# Altium PCB Copy of Controller.PcbDoc (part 2 of 2)
Units mm, origin at the board's own origin, x right, y up, seen from the top; angles counter-clockwise.
Board outline 100 x 80 mm, 2 copper layers (Top Layer, Bottom Layer); 164 components, 143 nets, 702 pads, 520 vias.
Unrouted connection lines stored in the file: 175.
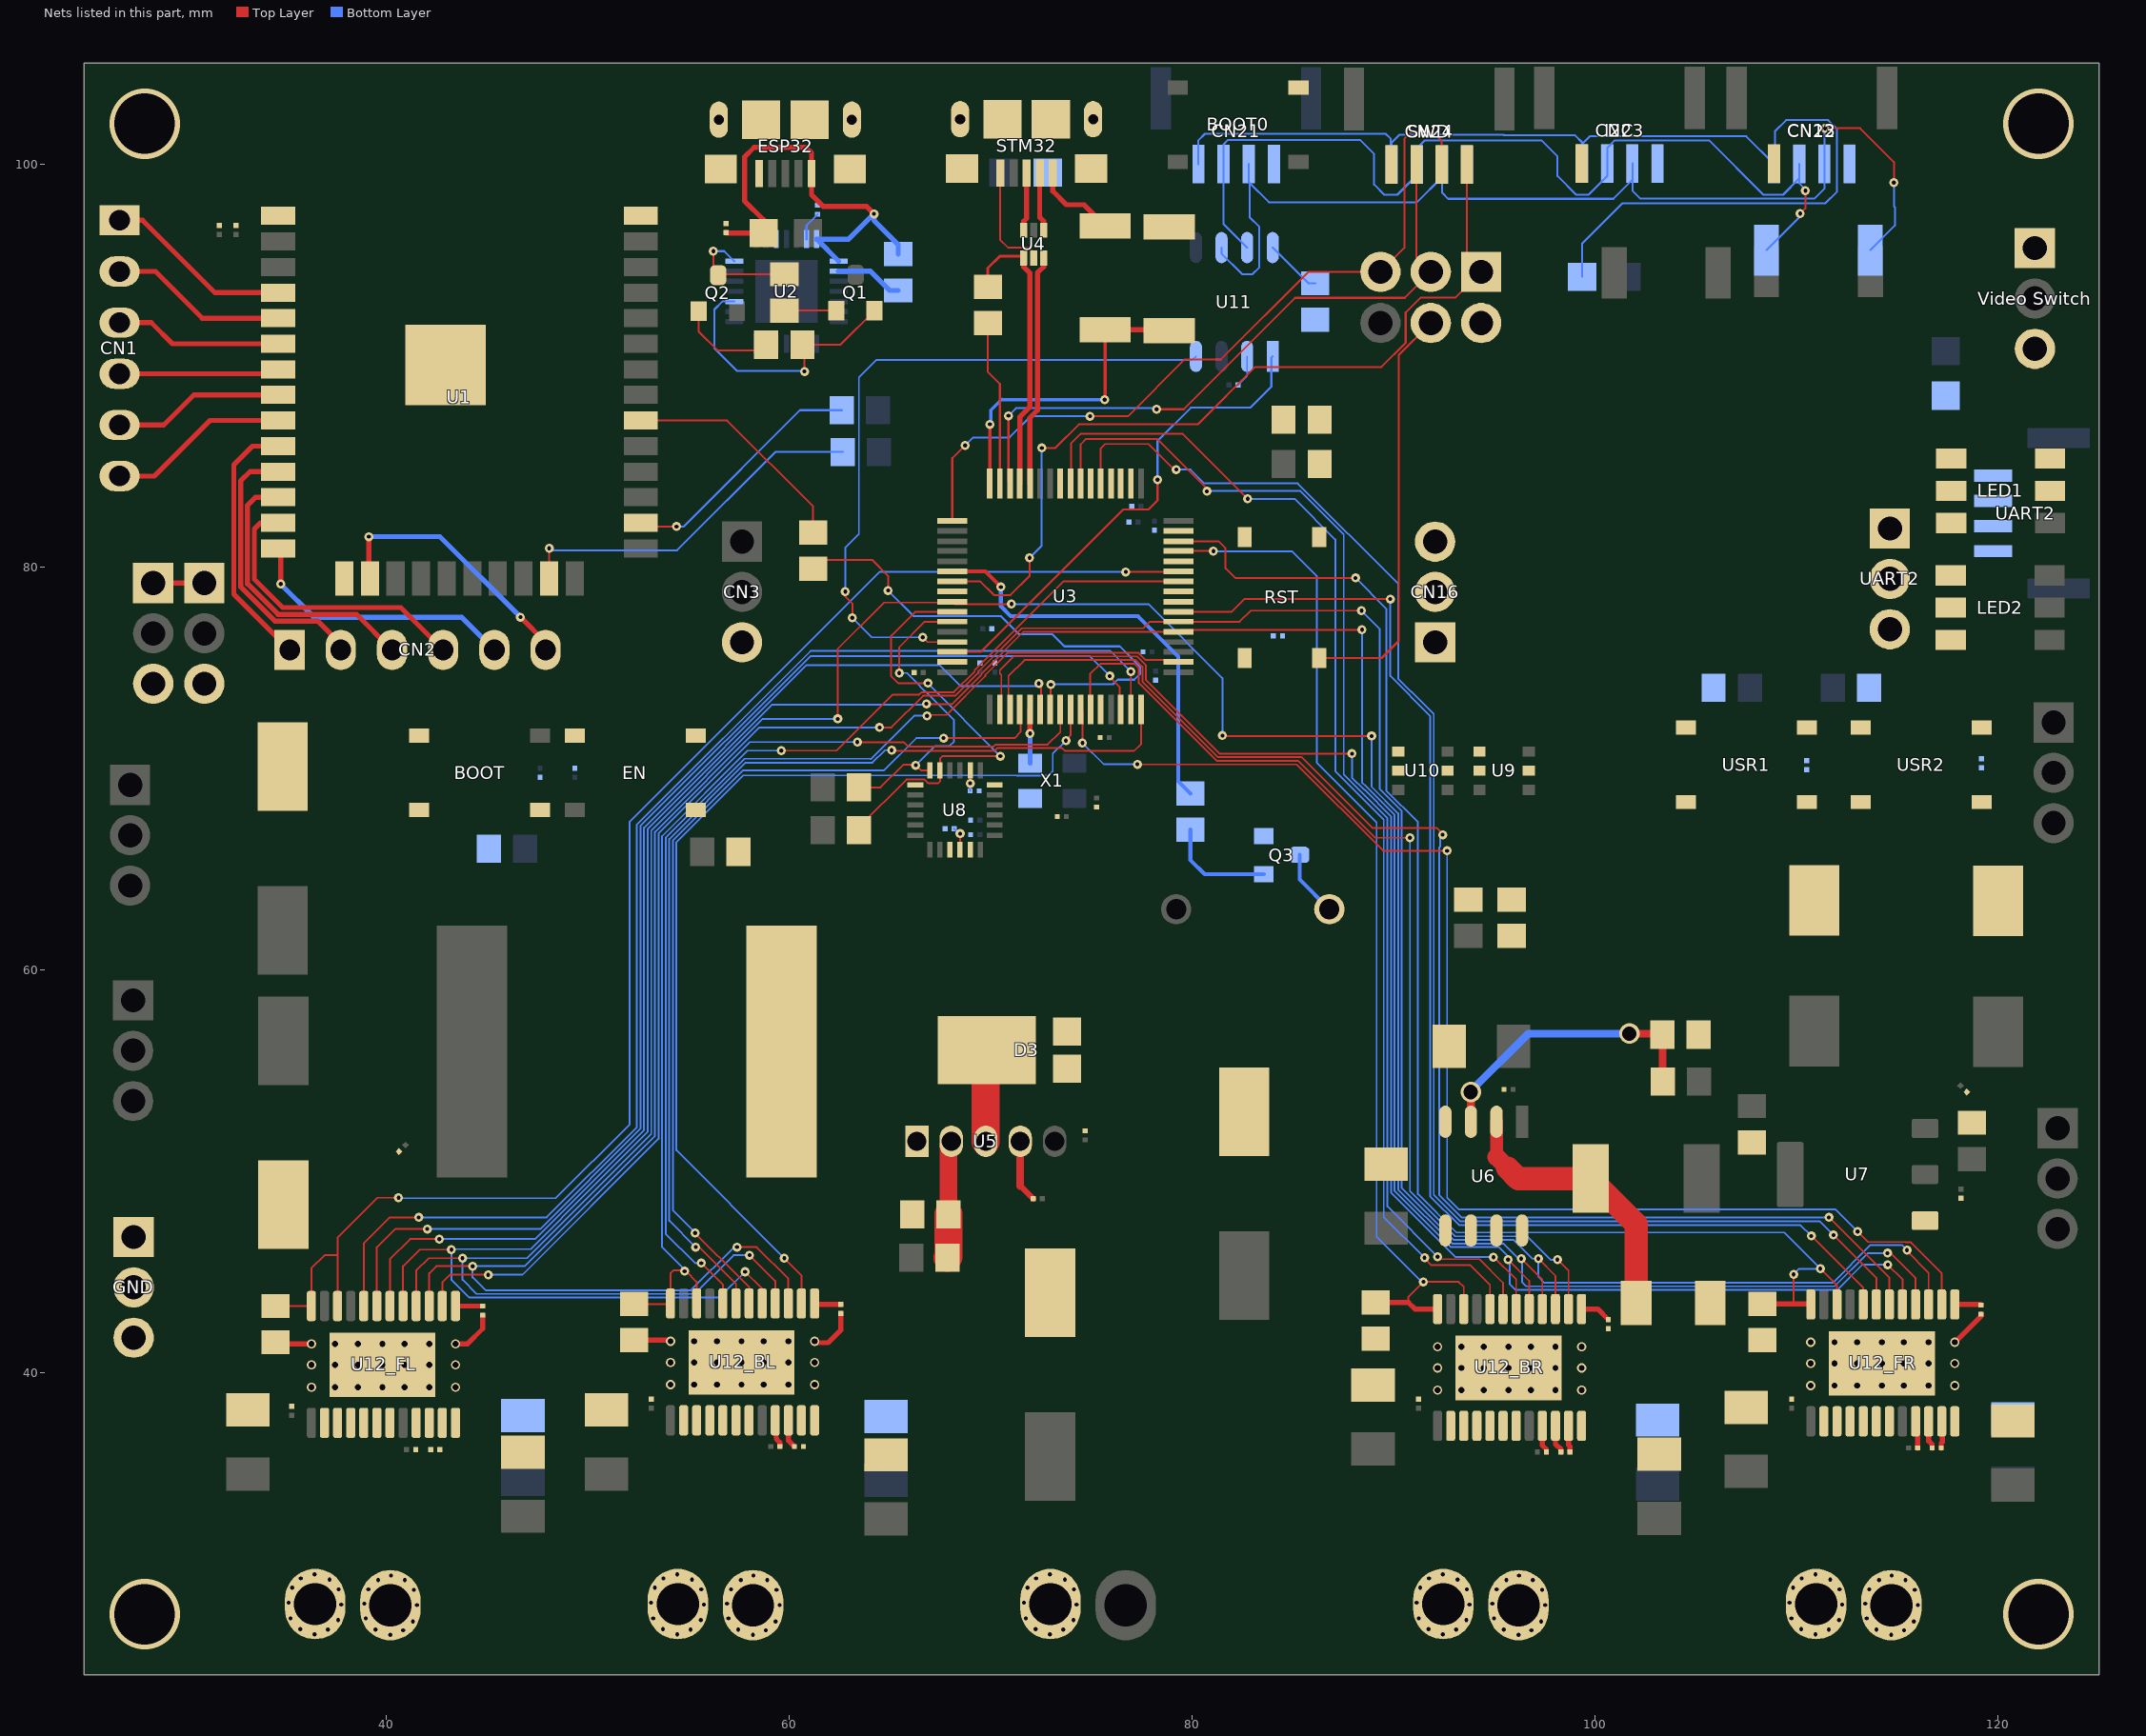
[diagram p2: the nets of this part, all layers, seen from the top]

## Via types
v1: diameter 0.457, hole 0.305, Top Layer to Bottom Layer, tented both sides, 160 vias
v2: diameter 0.45, hole 0.2, Top Layer to Bottom Layer, tented both sides, 142 vias
v3: diameter 0.276, hole 0.2, Top Layer to Bottom Layer, tented both sides, 120 vias
v4: diameter 0.457, hole 0.3, Top Layer to Bottom Layer, tented both sides, 84 vias
v5: diameter 0.45, hole 0.203, Top Layer to Bottom Layer, tented both sides, 4 vias
v6: diameter 3.5, hole 3, Top Layer to Bottom Layer, 4 vias
v7: diameter 1.6, hole 0.8, Top Layer to Bottom Layer, tented both sides, 3 vias
v8: diameter 1.016, hole 0.711, Top Layer to Bottom Layer, tented both sides, 2 vias
v9: diameter 1.981, hole 1.27, Top Layer to Bottom Layer, tented both sides, 1 vias

## Nets (pads, with @x,y where several pads share a name; then routed paths per layer and width w, separated by ;. In a path a pad name is that pad's centre, name@x,y a point inside that pad or via, vN(x,y) a via of type N, cw(c..) or ccw(c..) an arc to the next point about the centre after c; other vN are vias at no path point) (continued)
GND: "3S INPUT.K" "Video Switch.3" BOOT.3 C1.1 C2.1 C3.1 C4.1 C7.1 C8.1 C9.1 C10.1 C11.1 C12.1 C13.1 C14.1 C15.1 C16.1 C17.1 C18.2 C23.1 C24.2 C25.1 C26.1 C27.1 C28.1 C29.2 C30.2 C31.2 C32.2 C33.1 C34.1 C35.1 C36.1 C37.2 C38.1 C39.1 C40.1 C41.1 C42.1 C43.2 C46.1 C47.1 C48.1 C49.1 CN3.3 CN13.4 CN16.3 CN21.4 CN22.4 CN23.4 CN24.4 D3.1 D3.2 D4.A EN.3 ESP32.5 ESP32.S GND.1 GND.2 GND.3 I2C.4 LED1.3 LED2.3 pad.1@94.34,92.105 pad.3@28.421,74.197 pad.3@30.961,74.197 Q3.2 R9.1 R13.1 R16.2 R19.1 R23.2 R28.1 R29.1 RST.3 STM32.5 STM32.S SWD.4 U1.1 U1.15 U1.38 U2.3 U3.12 U3.31 U3.63 U4.2 U5.1 U6.4 U6.5 U6.6 U6.7 U6.8 U7.1 U8.1 U8.9 U8.11 U8.18 U9.2 U10.2 U11.2 U12_BL.16 U12_BL.17 U12_BL.24 U12_BL.THERM U12_BR.16 U12_BR.17 U12_BR.24 U12_BR.THERM U12_FL.16 U12_FL.17 U12_FL.24 U12_FL.THERM U12_FR.16 U12_FR.17 U12_FR.24 U12_FR.THERM UART2.3@114.625,76.9 UART2.4 USR1.3 USR2.3 X1.2 | length 17.5
  Top Layer w0.089: STM32.5@70.475,99.55 70.454,99.529 70.454,96.246 70.85,95.85 71.9,95.85 72.125,95.625 U4.2@72.125,95.335
  Top Layer w0.254: R29.1@34.5,41.5 34.575,41.425 v4(36.275,41.425) ; v4(43.425,41.425) 44.025,41.425 44.775,42.175 C43.2@44.775,42.85 ; R29.1@52.3,41.6 54.05,41.6 v4(54.1,41.55) ; v4(61.25,41.55) 61.325,41.475 61.925,41.475 62.55,42.1 C43.2@62.55,42.925 ; v4(117.85,41.5) 119.15,42.8 C43.2@119.15,42.9
  Bottom Layer w0.089: C42.1@82.275,89.025 82.72,89.47 U11.2@82.72,90.45
  other v3: 72.935,27.001 73.595,27.23 72.223,27.255 74.103,27.713 71.741,27.789 74.255,28.475 71.639,28.576 74.128,29.237 71.817,29.313 73.671,29.719 72.249,29.77 72.935,29.973
  other v4: 92.175,39.125 93.35,39.125 94.475,39.125 95.7,39.125 96.8,39.125 98.025,39.125 99.325,39.125 36.275,39.275 37.45,39.275 38.575,39.275 39.8,39.275 40.9,39.275 42.125,39.275 43.425,39.275 110.7,39.35 111.875,39.35 113,39.35 114.225,39.35 115.325,39.35 116.55,39.35 117.85,39.35 54.1,39.4 55.275,39.4 56.4,39.4 57.625,39.4 58.725,39.4 59.95,39.4 61.25,39.4 92.175,40.225 93.35,40.225 94.475,40.225 95.7,40.225 96.8,40.225 98.025,40.225 99.325,40.225 36.275,40.375 37.45,40.375 38.575,40.375 39.8,40.375 40.9,40.375 42.125,40.375 43.425,40.375 110.7,40.45 111.875,40.45 113,40.45 114.225,40.45 115.325,40.45 116.55,40.45 117.85,40.45 54.1,40.5 55.275,40.5 56.4,40.5 57.625,40.5 58.725,40.5 59.95,40.5 61.25,40.5 92.175,41.275 93.35,41.275 94.475,41.275 95.7,41.275 96.8,41.275 98.025,41.275 99.325,41.275 37.45,41.425 38.575,41.425 39.8,41.425 40.9,41.425 42.125,41.425 110.7,41.5 111.875,41.5 113,41.5 114.225,41.5 115.325,41.5 116.55,41.5 55.275,41.55 56.4,41.55 57.625,41.55 58.725,41.55 59.95,41.55
  other v6: 28,28 122,28 28,102 122,102
IN_I2C_SCL: R25.1 U3.58 U8.23 | length 22.1
  Top Layer w0.089: R25.1@63.45,66.925 63.45,67.084 65.805,69.438 66.705,69.438 66.894,69.25 67.375,69.25 67.475,69.35 U8.23@67.475,69.895 67.475,70.475 67.6,70.6 v2(70.475,70.6) ; v2@66.875,74.25 v2(66.875,74.225) 65.389,74.225 65.054,74.561 65.054,74.796 65.05,74.8 65.05,76.575 66.238,77.763 U3.58@68.087,77.763
  Bottom Layer w0.089: v2(66.875,74.225) 66.85,74.225 v2(70.475,70.6)
IN_I2C_SDA: R24.1 U3.59 U8.24 | length 15.7
  Top Layer w0.089: R24.1@63.45,69.05 64.525,69.05 65.65,70.175 66.25,70.175 v2(66.275,70.15) 66.53,69.895 U8.24@66.975,69.895 ; v2(65.45,74.725) 65.45,76 66.725,77.275 68.081,77.275 U3.59@68.087,77.28
  Bottom Layer w0.089: v2(65.45,74.725) 65.839,74.725 66.479,74.085 66.479,74.061 66.711,73.829 66.742,73.829 68.175,72.396 68.175,71.325 67.954,71.104 67.229,71.104 v2(66.275,70.15)
NetC3_2: C3.2 U2.6 | length 1.5
  Bottom Layer w0.1: U2.6@60.85,96.265 60.85,96.95 C3.2@61.4,97.5
NetC5_1: C5.1 EN.4
NetC6_1: BOOT.4 C6.1
NetC19_1: C19.1 RST.4
NetC20_1: C20.1 USR2.4
NetC21_1: C21.1 USR1.4
NetC22_1: C22.1 U5.4 | length 3.1
  Top Layer w0.305: 71.46,49.265 C22.1@72.1,48.625
  Top Layer w0.381: 71.46,49.265 U5.4@71.46,51.475
NetC40_2: C40.2 U8.20 | length 1
  Top Layer w0.089: v2(68.975,69.25) U8.20@68.975,69.895
  Bottom Layer w0.089: C40.2@68.975,68.875 v2(68.975,69.25)
NetC41_2: C41.2 U8.10 | length 1.2
  Top Layer w0.1: U8.10@68.475,65.955 v2(68.475,66.75)
  Bottom Layer w0.1: C41.2@68.175,67 68.425,66.75 v2(68.475,66.75)
NetC43_BL_1: C43.1@62.55,43.375 U12_BL.1 | length 1.3
  Top Layer w0.254: U12_BL.1@61.25,43.425 61.3,43.375 C43.1@62.55,43.375
NetC43_BR_1: C43.1@100.65,42.625 U12_BR.1 | length 1.5
  Top Layer w0.254: U12_BR.1@99.325,43.15 100.125,43.15 C43.1@100.65,42.625
NetC43_FL_1: C43.1@44.775,43.3 U12_FL.1 | length 1.3
  Top Layer w0.254: U12_FL.1@43.425,43.3 C43.1@44.775,43.3
NetC43_FR_1: C43.1@119.15,43.35 U12_FR.1 | length 1.3
  Top Layer w0.254: U12_FR.1@117.85,43.375 119.125,43.375 C43.1@119.15,43.35
NetC44_BL_1: C44.1@59.525,36.325 U12_BL.21 | length 2
  Top Layer w0.254: U12_BL.21@59.3,37 U12_BL.21@59.3,37.625 59.35,37.575 59.35,36.7 59.525,36.525 C44.1@59.525,36.325
NetC44_BR_1: C44.1@97.575,36.05 U12_BR.21 | length 1.4
  Top Layer w0.254: U12_BR.21@97.375,37.35 97.375,36.375 97.575,36.175 C44.1@97.575,36.05
NetC44_FL_1: C44.1@41.45,36.175 U12_FL.21
NetC44_FR_1: C44.1@116,36.25 U12_FR.21 | length 1.4
  Top Layer w0.254: U12_FR.21@115.9,37.575 116,37.475 C44.1@116,36.25
NetC45_BL_1: C45.1@60.7,36.325 U12_BL.23 | length 0.1
  Top Layer w0.254: U12_BL.23@60.6,37.625 U12_BL.23@60.7,37.525
NetC45_BL_2: C45.2@60.25,36.325 U12_BL.22 | length 1.4
  Top Layer w0.254: U12_BL.22@59.95,37.625 59.95,36.625 C45.2@60.25,36.325
NetC45_BR_1: C45.1@98.75,36.05 U12_BR.23 | length 1.3
  Top Layer w0.254: U12_BR.23@98.675,37.35 98.675,36.4 98.75,36.325 C45.1@98.75,36.05
NetC45_BR_2: C45.2@98.3,36.05 U12_BR.22 | length 1.4
  Top Layer w0.254: U12_BR.22@98.025,37.35 98.025,36.45 98.3,36.175 C45.2@98.3,36.05
NetC45_FL_1: C45.1@42.65,36.175 U12_FL.23
NetC45_FL_2: C45.2@42.2,36.175 U12_FL.22
NetC45_FR_1: C45.1@117.175,36.25 U12_FR.23 | length 1.4
  Top Layer w0.254: C45.1@117.175,36.25 117.175,36.5 117.225,36.55 117.225,37.55 U12_FR.23@117.2,37.575
NetC45_FR_2: C45.2@116.725,36.25 U12_FR.22 | length 1.4
  Top Layer w0.254: U12_FR.22@116.55,37.575 116.55,36.6 116.725,36.425 C45.2@116.725,36.25
NetCN1_1: CN1.1 U1.4 | length 9.4
  Top Layer w0.25: CN1.1@26.75,97.205 27.895,97.205 31.485,93.615 U1.4@34.625,93.615
NetCN1_2: CN1.2 U1.5 | length 8.8
  Top Layer w0.25: CN1.2@26.75,94.665 28.535,94.665 30.855,92.345 U1.5@34.625,92.345
NetCN1_3: CN1.3 U1.6 | length 8.3
  Top Layer w0.25: CN1.3@26.75,92.125 28.325,92.125 29.375,91.075 U1.6@34.625,91.075
NetCN1_4: CN1.4 U1.7 | length 8
  Top Layer w0.25: CN1.4@26.75,89.585 34.405,89.585 U1.7@34.625,89.805
NetCN1_5: CN1.5 U1.8 | length 8.5
  Top Layer w0.25: CN1.5@26.75,87.045 28.945,87.045 30.435,88.535 U1.8@34.625,88.535
NetCN1_6: CN1.6 U1.9 | length 9
  Top Layer w0.25: CN1.6@26.75,84.505 28.48,84.505 31.24,87.265 U1.9@34.625,87.265
NetCN2_1: CN2.1 U1.10 | length 12.9
  Top Layer w0.25: U1.10@34.625,85.995 33.345,85.995 32.425,85.075 32.425,78.645 CN2.1@35.195,75.875
NetCN2_2: CN2.2 U1.11 | length 13.7
  Top Layer w0.25: U1.11@34.625,84.725 33.225,84.725 32.764,84.264 32.764,79.011 34.475,77.3 36.6,77.3 37.735,76.165 CN2.2@37.735,75.875
NetCN2_3: CN2.3 U1.12 | length 14.1
  Top Layer w0.25: U1.12@34.625,83.455 33.505,83.455 33.103,83.053 33.103,79.151 34.615,77.639 38.511,77.639 CN2.3@40.275,75.875
NetCN2_4: CN2.4 U1.13 | length 14.6
  Top Layer w0.25: U1.13@34.625,82.185 33.752,82.185 33.442,81.875 33.442,79.383 34.847,77.978 40.712,77.978 CN2.4@42.815,75.875
NetCN2_5: CN2.5 U1.14 | length 13.8
  Top Layer w0.25: U1.14@34.625,80.915 34.75,80.79 v2(34.75,79.15)
  Bottom Layer w0.25: v2(34.75,79.15) 36.4,77.5 43.73,77.5 CN2.5@45.355,75.875
NetCN2_6: CN2.6 U1.16 | length 13.4
  Top Layer w0.25: v2(39.125,81.5) 39.125,79.47 U1.16@39.18,79.415 ; v2(46.65,77.5) 47.895,76.255 CN2.6@47.895,75.875
  Bottom Layer w0.25: v2(39.125,81.5) 42.65,81.5 v2(46.65,77.5)
NetCN14_1: CN16.1 pad.1@28.421,79.197 pad.1@30.961,79.197 U3.24 | length 2.5
  Top Layer w0.25: pad.1@28.421,79.197 pad.1@30.961,79.197
NetCN16_2: CN16.2 U3.25
NetCN18_1: "Video Switch.1" U3.34
NetCN19_1: D5.K UART2.1@119.75,84.525
NetCN19_2: U3.56 UART2.1@114.625,81.9 UART2.2@119.75,83.275
NetCN21_1: CN21.1 CN22.1 CN23.1 CN24.1 D6.K | length 58
  Bottom Layer w0.1: CN21.1@80.3,100 80.3,101.175 80.625,101.5 89.6,101.5 89.85,101.25 89.85,100.02 CN24.1@89.896,99.974 89.896,101.071 90.275,101.45 95.45,101.45 95.475,101.425 99,101.425 99.35,101.075 99.35,101 ; D6.K@99.35,94.4 99.35,96.05 101.35,98.05 111.425,98.05 112,98.625 112,101.744 111.567,102.177 109.477,102.177 108.925,101.625 108.925,100.05 CN22.1@108.875,100 107.5,101.375 99.725,101.375 99.35,101 ; CN23.1@99.35,100.025 99.35,101
NetCN21_2: CN21.2 CN22.2 CN23.2 CN24.2 R27.2 U11.7 | length 48.5
  Top Layer w0.1: v2(110.175,97.539) 110.43,97.795 v2(110.43,98.68) v2@110.43,98.73
  Bottom Layer w0.1: U11.7@82.72,95.85 81.55,97.02 CN21.2@81.55,100 81.55,100.975 81.775,101.2 88.325,101.2 89.025,100.5 89.025,98.975 89.525,98.475 90.175,98.475 91.146,99.446 CN24.2@91.146,99.974 91.146,100.771 91.55,101.175 97.325,101.175 98.125,100.375 98.125,99.4 99.05,98.475 99.675,98.475 100.6,99.4 CN23.2@100.6,100.025 100.6,100.8 100.975,101.175 105.65,101.175 108.35,98.475 109.325,98.475 CN22.2@110.125,99.275 ; R27.2@108.496,95.725 110.175,97.404 v2(110.175,97.539) ; CN22.2@110.125,100 CN22.2@110.125,99.275 ; v2(110.43,98.68) 110.43,98.745 110.125,99.05 CN22.2@110.125,99.275
NetCN21_3: CN21.3 CN22.3 CN23.3 CN24.3 R27.1 U11.6 | length 53.2
  Top Layer w0.1: v2(111.4,101.775) 113.15,101.775 114.825,100.1 v2(114.825,99.075)
  Bottom Layer w0.1: U11.6@81.45,95.85 81.45,95.55 82.475,94.525 82.975,94.525 83.325,94.875 83.325,96.875 82.85,97.35 CN21.3@82.85,99.05 ; CN21.3@82.8,100 82.8,99.1 CN21.3@82.85,99.05 ; CN24.3@92.396,99.974 CN24.3@92.396,99.346 ; CN23.3@101.85,100.025 CN23.3@101.85,99.225 ; v2(111.4,101.775) 111.4,101.8 111.375,101.775 CN22.3@111.375,100 111.375,98.775 110.878,98.278 102.247,98.278 101.85,98.675 CN23.3@101.85,99.225 ; R27.1@113.653,95.725 114.875,96.947 114.875,97.85 114.825,97.9 v2(114.825,99.075) ; CN21.3@82.85,99.05 83.8,98.1 91.15,98.1 CN24.3@92.396,99.346 ; CN24.3@92.396,99.346 92.396,98.579 92.7,98.275 100.9,98.275 CN23.3@101.85,99.225
NetCN25_A: FL_MOT.A U12_FL.18 U12_FL.19
  other v3: 40.194,26.976 40.829,27.205 39.457,27.23 41.311,27.636 38.975,27.789 41.515,28.449 38.898,28.525 41.362,29.211 39.102,29.237 39.584,29.694 40.905,29.694 40.219,29.922
NetCN25_K: FL_MOT.K U12_FL.14 U12_FL.15
  other v3: 36.435,27.001 37.095,27.23 35.723,27.255 37.603,27.713 35.241,27.789 37.755,28.475 35.139,28.576 37.628,29.237 35.317,29.313 37.171,29.719 35.749,29.77 36.435,29.973
NetCN26_A: FR_MOT.A U12_FR.18 U12_FR.19
  other v3: 114.694,26.976 115.329,27.205 113.957,27.23 115.811,27.636 113.475,27.789 116.015,28.449 113.398,28.525 115.862,29.211 113.602,29.237 114.084,29.694 115.405,29.694 114.719,29.922
NetCN26_K: FR_MOT.K U12_FR.14 U12_FR.15
  other v3: 110.935,27.001 111.595,27.23 110.223,27.255 112.103,27.713 109.741,27.789 112.255,28.475 109.639,28.576 112.128,29.237 109.817,29.313 111.671,29.719 110.249,29.77 110.935,29.973
NetCN27_A: BL_MOT.A U12_BL.18 U12_BL.19
  other v3: 58.194,26.976 58.829,27.205 57.457,27.23 59.311,27.636 56.975,27.789 59.515,28.449 56.898,28.525 59.362,29.211 57.102,29.237 57.584,29.694 58.905,29.694 58.219,29.922
NetCN27_K: BL_MOT.K U12_BL.14 U12_BL.15
  other v3: 54.435,27.001 55.095,27.23 53.723,27.255 55.603,27.713 53.241,27.789 55.755,28.475 53.139,28.576 55.628,29.237 53.317,29.313 55.171,29.719 53.749,29.77 54.435,29.973
NetCN28_A: BR_MOT.A U12_BR.18 U12_BR.19
  other v3: 96.194,26.976 96.829,27.205 95.457,27.23 97.311,27.636 94.975,27.789 97.515,28.449 94.898,28.525 97.362,29.211 95.102,29.237 95.584,29.694 96.905,29.694 96.219,29.922
NetCN28_K: BR_MOT.K U12_BR.14 U12_BR.15
  other v3: 92.435,27.001 93.095,27.23 91.723,27.255 93.603,27.713 91.241,27.789 93.755,28.475 91.139,28.576 93.628,29.237 91.317,29.313 93.171,29.719 91.749,29.77 92.435,29.973
NetD3_3: D3.3 L1.1 U5.3 | length 4.5
  Top Layer w1.397: U5.3@69.75,51.475 69.75,55.962 D3.3@69.793,56.005
NetD4_K: D4.K L2.1 U6.2 | length 14
  Top Layer w0.635: 95.1,50.7 U6.2@95.1,52.45
  Top Layer w0.889: 95.1,50.7 95.65,50.15
  Top Layer w1.143: 95.65,50.15 96.175,49.625 L2.1@99.775,49.625 102.036,47.365 D4.K@102.036,43.45
NetLED1_1: LED1.1 U9.5
NetLED1_2: LED1.2 U10.5
NetLED1_5: LED1.5 LED2.2
NetLED1_6: LED1.6 LED2.1
NetLS1_K: LS1.K Q3.3 | length 3.3
  Bottom Layer w0.2: Q3.3@85.325,65.7 85.325,64.475 LS1.K@86.8,63
NetQ1_1: Q1.1 R4.2 | length 2.6
  Top Layer w0.1: R4.2@59.75,92.725 Q1.1@62.325,92.725
NetQ1_2: Q1.2 R7.1 U2.24 | length 13.7
  Top Layer w0.1: v2(60.75,89.7) 60.75,90.925 R7.1@60.65,91.025 62.525,91.025 Q1.2@64.225,92.725
  Bottom Layer w0.1: U2.24@57.26,93.175 56.675,93.175 56.275,92.775 56.275,90.85 57.4,89.725 60.725,89.725 v2(60.75,89.7)
NetQ2_1: Q2.1 R7.2 | length 4.9
  Top Layer w0.1: Q2.1@55.5,92.7 55.5,91.675 56.425,90.75 58.575,90.75 R7.2@58.85,91.025
NetQ2_3: Q2.3 R4.1 U2.28 | length 5.8
  Top Layer w0.1: v2(56.225,95.675) 56.225,94.718 Q2.3@56.465,94.478 56.512,94.525 R4.1@59.75,94.525
  Bottom Layer w0.1: v2(56.225,95.675) 56.76,95.675 U2.28@57.26,95.175
NetQ3_1: Q3.1 R26.1 | length 5.4
  Bottom Layer w0.2: R26.1@79.9,66.95 79.9,65.45 80.615,64.735 Q3.1@83.547,64.735
NetR1_2: R1.2 U2.9 | length 3.4
  Bottom Layer w0.25: U2.9@62.44,94.675 64.025,94.675 64.975,93.725 R1.2@65.4,93.725
NetR2_2: EN.1 R2.2
NetR3_1: R3.1 U1.30 | length 11.6
  Top Layer w0.1: U1.30@52.625,87.265 56.91,87.265 61.175,83 R3.1@61.175,81.7
NetR5_1: R5.1 U1.26 | length 12.4
  Top Layer w0.1: U1.26@52.625,82.185 52.81,82 v2(54.4,82)
  Bottom Layer w0.1: v2(54.4,82) 54.75,82 60.525,87.775 R5.1@62.6,87.775
NetR6_2: BOOT.1 R6.2
NetR8_1: R8.1 U1.23 | length 18.1
  Top Layer w0.1: U1.23@48.07,79.415 48.075,79.42 v2(48.075,80.925)
  Bottom Layer w0.1: v2(48.075,80.925) 48.177,80.823 54.423,80.823 59.3,85.7 R8.1@62.65,85.7
NetR9_2: BOOT0.3 R9.2
NetR10_1: R10.1 U3.47 | length 8.2
  Top Layer w0.1: R10.1@69.85,92.1 69.85,89.675 70.449,89.076 U3.47@70.449,84.138
NetR11_2: R11.2 RST.1
NetR14_2: R14.2 USR2.1
NetR15_2: R15.2 USR1.1
NetR16_1: R16.1 R17.1 U6.3 | length 14.6
  Top Layer w0.381: v8(93.825,53.925) 93.825,53.725 93.83,53.72 U6.3@93.83,52.45 ; v8(101.7,56.825) 103.275,56.825 R16.1@103.325,56.775 103.35,56.75 R17.1@103.35,54.45
  Bottom Layer w0.381: v8(93.825,53.925) 93.8,53.95 96.675,56.825 v8(101.7,56.825)
NetR18_1: R18.1 R19.2 U5.2 | length 5.9
  Top Layer w0.076: U5.2@67.9,51.335 U5.2@68.04,51.475
  Top Layer w0.889: R19.2@67.9,47.85 U5.2@67.9,51.335
  Top Layer w1.397: R18.1@67.85,45.7 67.9,45.75 R19.2@67.9,47.85
NetR22_1: R22.1 R23.1 U3.28
NetR26_2: R26.2 U3.54 | length 20.6
  Top Layer w0.2: U3.54@68.087,79.77 69.73,79.77 v2(70.5,79)
  Bottom Layer w0.2: v2(70.5,79) 70.5,78.036 70.986,77.55 77.3,77.55 79.3,75.55 79.3,69.35 R26.2@79.9,68.75
NetR28_2: R28.2 U11.8 | length 2.8
  Bottom Layer w0.1: U11.8@83.99,95.85 85.765,94.075 R28.2@86.1,94.075
NetR29_BL_2: R29.2@52.3,43.4 U3.26 U12_BL.10 U12_BL.12 | length 59.1
  Top Layer w0.089: R29.2@52.3,43.4 54.075,43.4 U12_BL.12@54.05,43.425 ; U12_BL.12@54.1,43.425 54.1,44.925 54.25,45.075 54.75,45.075 v2(54.8,45.025) 54.875,45.025 55.4,44.5 U12_BL.10@55.4,43.425 ; v2(59.6,70.875) 62.35,70.875 65.132,73.657 65.307,73.657 65.311,73.654 66.441,73.654 66.566,73.778 68.164,73.778 69.195,74.809 69.195,74.86 73.622,79.287 U3.26@79.313,79.287
  Bottom Layer w0.089: v2(54.8,45.025) 54.875,45.025 53.681,46.219 53.681,66.631 57.925,70.875 v2(59.6,70.875)
NetR29_BR_2: R29.2@89.1,43.475 U3.29 U12_BR.10 U12_BR.12 | length 52.4
  Top Layer w0.089: U3.29@79.313,80.786 79.328,80.8 81.025,80.8 v2(81.05,80.775) ; 90.725,43.475 90.725,43.75 v2(91.475,44.5) 93.225,44.5 93.475,44.25 U12_BR.10@93.475,43.15
  Top Layer w0.254: R29.2@89.1,43.475 90.725,43.475 91.054,43.146 92.171,43.146 U12_BR.12@92.175,43.15
  Bottom Layer w0.089: v2(81.05,80.775) 84.95,80.775 86.175,79.55 86.175,70.275 89.15,67.3 89.15,46.739 91.389,44.5 v2(91.475,44.5)
NetR29_FL_2: R29.2@34.5,43.3 U3.27 U12_FL.10 U12_FL.12 | length 72.9
  Top Layer w0.089: R29.2@34.5,43.3 U12_FL.12@36.275,43.3 36.275,45.175 36.925,45.825 37.55,45.825 37.575,45.85 ; U12_FL.10@37.575,43.3 37.575,45.85 ; v2(40.6,48.675) 39.55,48.675 37.575,46.7 37.575,45.85 ; v2(76.7,79.75) 79.294,79.75 U3.27@79.313,79.77
  Bottom Layer w0.089: v2(40.6,48.675) 40.625,48.65 48.398,48.65 52.075,52.327 52.075,67.35 64.475,79.75 v2(76.7,79.75)
NetR29_FR_2: R29.2@108.3,43.4 U3.30 U12_FR.10 U12_FR.12 | length 71
  Top Layer w0.089: U3.30@79.313,81.268 81.307,81.268 81.65,80.925 81.65,79.925 82.125,79.45 v2(88.1,79.45) ; 109.85,43.4 v2(109.85,44.875) ; v2(111.175,45.15) 112,44.325 U12_FR.10@112,43.375
  Top Layer w0.254: R29.2@108.3,43.4 109.85,43.4 110.675,43.4 U12_FR.12@110.7,43.375
  Bottom Layer w0.089: v2(88.1,79.45) 89.631,77.919 89.631,73.816 89.629,73.814 89.629,68.898 91.196,67.33 91.196,48.861 93.108,46.95 109.375,46.95 v2(111.175,45.15) 110.125,45.15 v2(109.85,44.875)
NetU3_2: U3.2 U12_BR.6 | length 54.3
  Top Layer w0.089: U3.2@70.449,72.912 70.521,72.984 70.521,74.639 70.449,74.712 70.449,74.874 71.127,75.552 77.262,75.552 77.702,75.112 77.702,74.374 81.352,70.725 v2(87.925,70.725) ; v2(94.95,45.725) 94.975,45.725 96.075,44.625 U12_BR.6@96.075,43.15
  Bottom Layer w0.089: v2(87.925,70.725) 87.925,69.531 88.531,68.925 88.55,68.925 89.862,67.613 89.862,48.938 93.075,45.725 v2(94.95,45.725)
NetU3_3: U3.3 U12_FR.6 | length 71.1
  Top Layer w0.089: U3.3@70.957,72.912 70.875,72.993 70.875,74.575 71.674,75.374 77.188,75.374 77.524,75.038 77.524,74.301 81.278,70.547 85.428,70.547 88.95,67.025 92.15,67.025 92.45,66.725 v2(92.425,66.7) ; v2(111.6,47.7) 114.6,44.7 U12_FR.6@114.6,43.375
  Bottom Layer w0.089: v2(92.425,66.7) 92.3,66.7 92.3,66.111 92.254,66.064 92.254,48.811 93.364,47.7 v2(111.6,47.7)
NetU3_4: U3.4 U12_BL.6 | length 45.2
  Top Layer w0.089: v2(55.325,46.925) 55.325,46.914 57.636,44.604 57.646,44.604 58,44.25 U12_BL.6@58,43.425 ; v2(67.65,71.5) 71.175,71.5 71.475,71.8 71.475,72.876 U3.4@71.439,72.912
  Bottom Layer w0.089: v2(55.325,46.925) 55.35,46.925 54.214,48.06 54.214,66.41 57.69,69.885 64.685,69.885 66.3,71.5 v2(67.65,71.5)
NetU3_6: U3.6 U12_FL.6 | length 57.4
  Top Layer w0.089: U12_FL.6@40.175,43.3 40.175,45.625 41.175,46.625 v2(42.625,46.625) ; v2(72.379,74.204) 72.5,74.082 72.5,72.956 U3.6@72.455,72.912
  Bottom Layer w0.089: v2(42.625,46.625) 47.38,46.625 52.787,52.032 52.787,67.055 60.853,75.121 67.442,75.121 68.485,74.079 72.253,74.079 v2(72.379,74.204)
NetU3_8: U3.8 U12_FL.2 | length 53.3
  Top Layer w0.089: U12_FL.2@42.775,43.3 42.775,44.475 43.15,44.85 v2(45.05,44.85) ; v2(63.375,71.3) 63.379,71.296 65.679,71.296 65.897,71.078 70.141,71.078 70.237,71.174 72.824,71.174 73.45,71.8 73.45,72.908 U3.8@73.446,72.912
  Bottom Layer w0.089: v2(45.05,44.85) 46.75,44.85 53.503,51.603 53.503,66.765 58.038,71.3 v2(63.375,71.3)
NetU3_9: U3.9 U12_BL.2 | length 49.1
  Top Layer w0.089: v2(59.75,45.675) 60.6,44.825 U12_BL.2@60.6,43.425 ; v2(73.725,71.375) 73.725,71.4 73.954,71.629 U3.9@73.954,72.912
  Bottom Layer w0.089: v2(59.75,45.675) 54.392,51.033 54.392,66.336 57.703,69.646 71.29,69.646 71.295,69.642 72.867,69.642 73.075,69.85 73.075,70.725 v2(73.725,71.375)
NetU3_10: U3.10 U12_FR.2 | length 66.9
  Top Layer w0.089: U3.10@74.462,72.912 74.55,72.824 v2(74.55,71.25) ; v2(77.275,70.2) 77.284,70.191 85.182,70.191 89.473,65.9 v2(92.65,65.9) ; v2(113.025,47) 113.55,46.475 115.4,46.475 115.404,46.471 115.639,46.471 117.2,44.911 U12_FR.2@117.2,43.375
  Bottom Layer w0.089: v2(74.55,71.25) 75.6,70.2 v2(77.275,70.2) ; v2(92.65,65.9) 92.65,48.666 93.216,48.1 111.925,48.1 v2(113.025,47)
NetU3_11: U3.11 U12_BR.2 | length 50.8
  Top Layer w0.089: U3.11@74.945,72.912 74.925,72.931 74.925,74.671 75.45,75.196 77.114,75.196 77.346,74.964 77.346,74.227 81.204,70.369 85.256,70.369 89.075,66.55 v2(90.8,66.55) ; v2(98.125,45.6) 98.675,45.05 U12_BR.2@98.675,43.15
  Bottom Layer w0.089: v2(90.8,66.55) 90.803,66.547 90.803,49.003 93.048,46.759 96.627,46.759 97.786,45.6 v2(98.125,45.6)
NetU3_14: U3.14 U12_FL.7 | length 62.6
  Top Layer w0.089: U12_FL.7@39.525,43.3 39.525,46.225 40.425,47.125 v2(42.025,47.125) ; v2(75.9,74.575) 75.9,74.525 76.4,74.025 76.4,72.955 U3.14@76.443,72.912
  Bottom Layer w0.089: v2(42.025,47.125) 47.628,47.125 52.609,52.106 52.609,67.129 61.055,75.575 74.9,75.575 v2(75.9,74.575)
NetU3_15: U3.15 U12_FL.8 | length 64.5
  Top Layer w0.089: U12_FL.8@38.875,43.3 38.875,46.4 40.175,47.7 v2(41.6,47.7) ; U3.15@76.951,72.912 76.951,74.799 v2(76.95,74.8)
  Bottom Layer w0.089: v2(41.6,47.7) 47.952,47.7 52.431,52.179 52.431,67.203 61.055,75.827 75.923,75.827 v2(76.95,74.8)
NetU3_16: U3.16 U12_BL.7 | length 51.8
  Top Layer w0.089: v2(55.353,46.227) 55.523,46.227 57.35,44.4 U12_BL.7@57.35,43.425 ; v2(65.075,70.9) 65.121,70.854 70.168,70.854 70.311,70.996 73.543,70.996 73.686,70.854 77.104,70.854 77.459,71.209 U3.16@77.459,72.912
  Bottom Layer w0.089: v2(55.353,46.227) 55.35,46.225 54.037,47.538 54.037,66.483 57.825,70.272 64.124,70.272 64.752,70.9 v2(65.075,70.9)
NetU3_18: U3.18 U12_BL.8 | length 54.1
  Top Layer w0.089: v2(55.628,45.427) 55.628,45.447 56.7,44.375 U12_BL.8@56.7,43.425 ; v2(66.828,72.604) 66.828,72.647 67.797,72.647 69.729,74.579 69.729,74.639 70.819,75.73 77.335,75.73 77.691,75.374 79.213,75.374 U3.18@79.313,75.274
  Bottom Layer w0.089: v2(55.628,45.427) 55.322,45.427 53.859,46.891 53.859,66.557 57.777,70.475 64.025,70.475 64.05,70.45 66.2,72.6 66.196,72.604 v2(66.828,72.604)
NetU3_23: U3.23 U12_FR.8 | length 65.4
  Top Layer w0.089: U3.23@79.313,77.763 81.938,77.763 82.575,78.4 v2(89.825,78.4) ; v2(110.725,46.775) 113.3,44.2 U12_FR.8@113.3,43.375
  Bottom Layer w0.089: v2(89.825,78.4) 89.825,74.575 91.806,72.594 91.806,48.756 93.236,47.325 110.175,47.325 v2(110.725,46.775)
NetU3_35: U3.35 U9.1
NetU3_36: U3.36 U10.1
NetU3_37: U3.37 U12_FR.7 | length 75.5
  Top Layer w0.089: U3.37@75.453,84.138 75.453,85.878 75.675,86.1 77.825,86.1 79.096,84.829 v2(79.204,84.829) ; v2(111.825,46.825) 113.95,44.7 U12_FR.7@113.95,43.375
  Bottom Layer w0.089: v2(79.204,84.829) 79.917,84.829 80.6,84.146 85.23,84.146 90.225,79.152 90.225,74.427 90.852,73.8 90.875,73.8 91.983,72.692 91.983,48.829 93.31,47.503 111.147,47.503 v2(111.825,46.825)
NetU3_39: U3.39 U12_BR.7 | length 60.1
  Top Layer w0.089: U3.39@74.462,84.138 74.462,86.087 74.725,86.35 78.244,86.35 80.725,83.869 v2(80.725,83.75) ; v2(92.175,45.75) 92.175,45.625 94.25,45.625 95.425,44.45 U12_BR.7@95.425,43.15
  Bottom Layer w0.089: v2(80.725,83.75) 80.75,83.775 85.35,83.775 87.515,81.61 87.515,69.69 89.684,67.521 89.684,48.241 v2(92.175,45.75)
NetU3_40: U3.40 U12_BR.8 | length 60
  Top Layer w0.089: U3.40@73.954,84.138 73.975,84.159 73.975,86.125 74.45,86.6 79.525,86.6 v2(82.75,83.375) ; v2(91.529,45.702) 91.529,45.671 91.875,45.325 93.8,45.325 94.775,44.35 U12_BR.8@94.775,43.15
  Bottom Layer w0.089: v2(82.75,83.375) 85.075,83.375 87.1,81.35 87.1,69.853 89.506,67.447 89.506,47.717 91.525,45.698 v2(91.529,45.702)
NetU3_61: U3.61 U11.4 | length 35
  Top Layer w0.089: v2(62.775,78.775) 62.775,78.525 63.125,78.175 v2(63.125,77.475) ; v2(66.625,76.5) 66.861,76.264 U3.61@68.087,76.264
  Bottom Layer w0.089: v2(62.775,78.775) 62.775,80.95 63.45,81.625 63.45,89.4 64.325,90.275 80.005,90.275 U11.4@80.18,90.45 ; v2(63.125,77.475) 64.1,76.5 v2(66.625,76.5)
NetU3_62: U3.62 U11.1 | length 24.5
  Top Layer w0.1: U3.62@68.087,75.782 69.507,75.782 76.575,82.85 77.825,82.85 78.275,83.3 v2(78.275,84.325)
  Bottom Layer w0.1: v2(78.275,84.325) 78.275,86.25 79.925,87.9 82.875,87.9 83.925,88.95 83.925,90.385 U11.1@83.99,90.45
NO_ESD_N: STM32.2 U4.4 | length 2.9
  Top Layer w0.254: STM32.2@72.425,99.55 72.425,97.353 72.625,97.153 U4.4@72.625,96.715
NO_ESD_P: STM32.3 U4.6 | length 2.9
  Top Layer w0.254: U4.6@71.625,96.715 71.625,97.153 71.775,97.303 STM32.3@71.775,99.55
nRST: C19.2 pad.2@91.84,92.105 R3.2 RST.2 U3.7 | length 46
  Top Layer w0.1: R3.2@61.175,79.9 61.625,80.35 64.1,80.35 64.9,79.55 v2(64.9,78.825) ; U3.7@72.938,72.912 72.975,72.949 v2(72.975,74.15) ; RST.2@86.3,75.475 89.4,75.475 90.25,76.325 90.25,90.515 pad.2@91.84,92.105
  Bottom Layer w0.1: v2(64.9,78.825) 66.175,77.55 70.5,77.55 71.398,76.652 73.048,76.652 73.65,76.05 76.4,76.05 77.4,75.05 77.4,74.681 77.117,74.398 76.292,74.398 76.067,74.173 72.998,74.173 v2(72.975,74.15)
RCC_OSC_IN: U3.5 X1.3 | length 2.7
  Top Layer w0.254: U3.5@71.947,72.912 71.947,71.803 71.95,71.8 v5(71.95,71.725)
  Bottom Layer w0.254: X1.3@71.95,70.25 v5(71.95,71.725)
SPI_MISO: U3.22 U12_BL.3 U12_BR.3 U12_FL.3 U12_FR.3 | length 153.6
  Top Layer w0.089: U12_FL.3@42.125,43.3 42.125,44.925 42.475,45.275 v2(44.275,45.275) ; v2(57.403,46.227) 58.373,46.227 59.95,44.65 U12_BL.3@59.95,43.425 ; v2(64.475,72.025) 65.064,72.025 66.639,73.6 68.237,73.6 69.373,74.735 69.373,74.787 71.536,76.95 77.575,76.95 77.9,77.275 82.35,77.275 82.9,77.825 v2(88.4,77.825) ; v2(97.175,45.65) 98.025,44.8 U12_BR.3@98.025,43.15 ; v2(115.475,46.075) 115.425,46.075 116.55,44.95 U12_FR.3@116.55,43.375
  Bottom Layer w0.089: v2(57.403,46.227) 57.263,46.227 55.116,44.081 44.919,44.081 44.275,44.725 v2(44.275,45.275) 46.85,45.275 53.325,51.75 53.325,66.839 58.511,72.025 v2(64.475,72.025) ; v2(88.4,77.825) 89.3,76.925 89.3,68.975 90.395,67.88 90.395,49.159 92.974,46.581 95.955,46.581 96.886,45.65 v2(97.175,45.65) 97.175,44.75 97.469,44.456 111.804,44.456 113.673,46.325 115.225,46.325 v2(115.475,46.075)
SPI_MOSI: U3.57 U12_BL.4 U12_BR.4 U12_FL.4 U12_FR.4 | length 154.5
  Top Layer w0.089: U12_FL.4@41.475,43.3 41.475,45.05 42.1,45.675 v2(43.775,45.675) ; v2(58.025,45.825) 59.3,44.55 U12_BL.4@59.3,43.425 ; v2(62.4,72.45) 62.4,75.925 64.7,78.225 68.041,78.225 U3.57@68.087,78.271 68.208,78.15 v2(71.025,78.15) ; v2(81.5,71.625) 81.525,71.6 v2(88.9,71.6) ; v2(96.325,45.65) 97.375,44.6 U12_BR.4@97.375,43.15 ; v2(114.506,45.927) 114.648,45.927 115.9,44.675 U12_FR.4@115.9,43.375
  Bottom Layer w0.089: v2(58.025,45.825) 57.225,45.825 55.303,43.903 44.472,43.903 43.775,44.6 v2(43.775,45.675) 46.977,45.675 53.142,51.841 53.142,66.908 58.685,72.45 v2(62.4,72.45) v2@62.5,72.45 ; v2(71.025,78.15) 77.825,78.15 81.5,74.475 v2(81.5,71.625) ; v2(88.9,71.6) 88.9,69.078 90.217,67.761 90.217,49.086 92.9,46.403 95.433,46.403 96.186,45.65 v2(96.325,45.65) 96.375,45.6 96.375,44.475 96.572,44.278 111.878,44.278 113.522,45.922 114.5,45.922 v2(114.506,45.927)
SPI_SCLK: U3.21 U12_BL.5 U12_BR.5 U12_FL.5 U12_FR.5 | length 151.9
  Top Layer w0.089: U12_FL.5@40.825,43.3 40.825,45.275 41.65,46.1 v2(43.225,46.1) ; v2(57.8,45) 58.65,44.15 U12_BL.5@58.65,43.425 ; v2(66.8,73.2) 66.825,73.175 68.064,73.175 69.551,74.662 69.551,74.713 71.61,76.772 U3.21@79.313,76.772 79.416,76.875 v2(88.425,76.875) ; v2(95.675,45.6) 96.725,44.55 U12_BR.5@96.725,43.15 ; v2(114.525,45.35) 115.25,44.625 U12_FR.5@115.25,43.375
  Bottom Layer w0.089: v2(57.8,45) 56.525,43.725 44.1,43.725 43.225,44.6 v2(43.225,46.1) 43.25,46.125 47.175,46.125 48.7,47.65 48.7,47.675 52.964,51.939 52.964,66.982 59.141,73.159 66.759,73.159 v2(66.8,73.2) ; v2(88.425,76.875) 88.425,69.3 88.622,69.103 88.624,69.103 90.039,67.687 90.039,49.012 92.827,46.225 95.225,46.225 95.675,45.775 v2(95.675,45.6) 95.75,45.525 95.75,44.4 96.05,44.1 112,44.1 113.25,45.35 v2(114.525,45.35)
SWCLK: pad.3@89.34,94.645 SWD.2 U3.49 | length 38.6
  Top Layer w0.1: U3.49@68.087,82.284 68.087,85.387 v2(68.725,86.025) ; v2(74.925,87.475) 76.8,87.475 79.625,90.3 81.425,90.3 85.77,94.645 pad.3@89.34,94.645 90.525,95.83 90.525,101.25 90.875,101.6 91.925,101.6 92.379,101.146 SWD.2@92.379,99.974
  Bottom Layer w0.1: v2(68.725,86.025) 69.125,86.425 70.925,86.425 71.975,87.475 v2(74.925,87.475)
SWDIO: pad.2@91.84,94.645 SWD.3 U3.46 | length 33
  Top Layer w0.1: v2(70.875,87.5) 70.875,84.22 U3.46@70.957,84.138 ; v2(78.225,87.825) 79.575,87.825 85.105,93.355 90.55,93.355 pad.2@91.84,94.645 91.129,95.356 SWD.3@91.129,99.974
  Bottom Layer w0.1: v2(70.875,87.5) 71.252,87.877 78.173,87.877 v2(78.225,87.825)
SWO: pad.1@94.34,94.645 SWD.1 U3.55 UART2.2@114.625,79.4 UART2.3@119.75,82.025 | length 43.1
  Top Layer w0.1: U3.55@68.087,79.287 69.463,79.287 70.152,78.598 70.973,78.598 71.925,79.55 v2(71.925,80.45) ; v2(72.525,85.9) 73.2,85.9 74.373,87.073 80.273,87.073 83.125,89.925 89.393,89.925 90.59,91.122 90.59,92.623 91.342,93.375 93.07,93.375 pad.1@94.34,94.645 93.629,95.356 SWD.1@93.629,99.974
  Bottom Layer w0.1: v2(71.925,80.45) 72.525,81.05 v2(72.525,85.9)
USB_DETECT: R12.1 R13.2 U3.48 | length 16.2
  Top Layer w0.15: U3.48@69.941,84.138 69.95,84.148 v2(69.95,87.075) ; v2@75.675,88.3 R12.1@75.675,91.772
  Top Layer w0.254: R12.1@75.675,91.772 78.8,91.772 R13.2@78.85,91.721
  Bottom Layer w0.15: v2(69.95,87.075) 70,87.125 70,87.775 70.55,88.325 70.575,88.3 v2(75.65,88.3)
USB_N: U3.44 U4.3 | length 11.5
  Top Layer w0.127: 71.944,84.941 71.947,84.938
  Top Layer w0.254: 71.944,84.941 71.944,87.406 72.315,87.777 72.315,94.587 72.625,94.897 U4.3@72.625,95.335 ; U3.44@71.947,84.138 71.947,84.938
USB_P: R10.2 U3.45 U4.1 | length 14.5
  Top Layer w0.127: R10.2@69.85,93.9 69.85,94.825 70.45,95.425 71.535,95.425 U4.1@71.625,95.335
  Top Layer w0.254: U3.45@71.439,84.138 71.439,87.439 71.934,87.935 71.934,94.587 71.625,94.897 U4.1@71.625,95.335
USR_BTN1: C21.2 U3.38 USR1.2
USR_BTN2: C20.2 U3.41 USR2.2
VBUS_ESP: C4.2 D1.A ESP32.1 R1.1 U2.7 U2.8 | length 22.7
  Top Layer w0.254: C4.2@56.85,96.6 56.875,96.575 D1.A@58.725,96.575 58.725,97.225 57.775,98.175 57.775,100.35 58.25,100.825 60.825,100.825 61.1,100.55 ESP32.1@61.1,99.525 61.1,98.475 61.675,97.9 63.825,97.9 v5(64.2,97.525)
  Bottom Layer w0.254: U2.8@62.44,95.175 U2.7@61.35,96.265 62.94,96.265 v5(64.2,97.525) 64.2,97.2 65.4,96 R1.1@65.4,95.525
VBUS_STM: D2.A R12.2 STM32.1 | length 4.2
  Top Layer w0.254: STM32.1@73.075,99.55 73.075,98.65 73.75,97.975 74.628,97.975 R12.2@75.675,96.929
pads on no net: BOOT0.2 CN13.5 CN21.5 CN22.5 CN23.5 CN24.5 ESP32.4 I2C.5 LED2.5 LED2.6 STM32.4 SWD.5 U1.17 U1.18 U1.19 U1.20 U1.21 U1.22 U1.24 U1.29 U1.31 U1.32 U1.33 U1.36 U1.37 U2.1 U2.2 U2.10 U2.11 U2.12 U2.13 U2.14 U2.15 U2.16 U2.17 U2.18 U2.19 U2.20 U2.21 U2.22 U2.23 U2.27 U2.29 U7.4 U8.2 U8.3 U8.4 U8.5 U8.6 U8.7 U8.12 U8.14 U8.15 U8.16 U8.17 U8.19 U8.21 U8.22 U11.5 UART2.5

## Other copper
Top Layer:
  region net 5V: 105.75,53.8 106.55,53.8 106.55,49 105.75,49
  region net 5V: 109.625,55.45 112.1,55.45 112.75,54.8 108.975,54.8
  region net 8V4: 26.15,59.75 26.15,52.2 28.7,52.2 28.7,59.75
  region net 8V4: 26.15,57.2 26.15,54.7 37.525,54.7 42.525,49.7 46,49.7 46,62.175 42.5,62.175 37.525,57.2
  region net NetD3_3: 72.2,54.35 64.55,54.35 61.25,51.05 61.25,61.1 64.675,57.675 72.2,57.675
  region net GND: 121.8,36.75 117.625,36.75 117.625,38.45 117.2,38.875 117.2,39 118.1,39.9 120.325,39.9 121.8,38.425
  region net 12V: 115.025,38.325 115.025,34.3 116.65,32.675 116.65,30.5 121.8,30.5 121.8,33.6 119.775,35.625 116.075,35.625 115.475,36.225 115.475,38.325
  region net 12V: 110.925,38.325 110.925,34 109.05,32.125 109.05,30.5 105.75,30.5 105.75,34.15 109.925,38.325
  region net NetCN26_K: 111.125,38.275 111.125,33.9 109.25,32.025 109.25,27.125 109.925,26.45 112.7,26.45 112.7,36.325 112.225,36.8 112.225,38.275
  region net GND: 113.525,36.925 112.425,36.925 112.425,38.374 111.726,39.025 114.25,39.025 113.525,38.35
  region net NetCN26_A: 113.725,38.25 113.725,36.8 112.925,36 112.925,26.45 115.9,26.45 116.425,26.975 116.425,32.15 114.825,33.75 114.825,38.25
  region net GND: 104.25,35.125 100.575,35.125 99.1,36.6 99.1,38.3 98.625,38.775 98.925,39.075 107,39.075 104.25,36.325
  region net 12V: 104.25,31.95 102.8,30.5 101.425,30.5 101.425,33.55 101.45,33.575 104.25,33.575
  region net 12V: 96.5,38.1 96.5,34.075 98.125,32.45 98.125,30.5 101.65,30.5 101.65,33.575 100.475,33.575 98.35,35.7 97.375,35.7 96.95,36.125 96.95,38.1
  region net 12V: 92.4,38.1 92.4,33.9 90.525,32.025 90.525,30.5 86.35,30.5 86.35,33.6 90.85,38.1
  region: 92.4,36.6
  region net NetCN28_K: 93.7,38.025 92.6,38.025 92.6,33.8 90.725,31.925 90.725,27.15 91.425,26.45 94.2,26.45 94.2,36.075 93.7,36.575
  region net GND: 95,36.675 93.9,36.675 93.9,38.147 93.3,38.675 95.6,38.675 95,38.125
  region net GND: 71.325,30.25 71.325,32.2 74.425,32.2 74.425,38.975 83.4,38.975 74.675,30.25
  region net GND: 74.7,26.475 70.725,26.475 66.425,30.775 66.425,33.575 63.375,36.625 63.375,39.7 63.4,39.675 71.475,39.675 71.475,32.325 73.35,30.45 74.7,30.45
  region net NetCN28_A: 95.2,38.025 95.2,36.575 94.45,35.825 94.45,26.475 97.425,26.475 97.925,26.975 97.925,32.35 96.3,33.975 96.3,38.025
  region net GND: 35.65,38.775 34.2,37.325 32.05,37.325 32.05,40.35 33.8,42.1 117.3,42.1 117.3,38.775
  region net 12V: 71.7,34.275 71.7,32.4 74.175,32.4 74.175,34.275
  region: 78.425,26.45
  region net NetC45_BL_1: 60.825,36.2 60.6,36.2 60.6,36.65 60.375,36.875 60.375,37.075 60.825,37.075
  region net GND: 65.875,35.1 62.65,35.1 61.05,36.7 61.05,38.375 60.275,39.15 60.925,39.8 62.825,39.8 65.875,36.75
  region net 12V: 58.425,38.375 58.875,38.375 58.875,36.425 61.725,33.575 64.95,33.575 64.95,30.5 60.1,30.5 60.1,31.95 58.425,33.625
  region net 12V: 54.325,38.35 54.325,33.55 52.55,31.775 52.55,30.5 49.05,30.5 49.05,34.4 50.45,35.8 52.1,35.8 53.025,36.725 53.025,38.35
  region net NetCN27_K: 55.625,38.3 54.525,38.3 54.525,33.45 52.75,31.675 52.75,27.15 53.475,26.425 56.2,26.425 56.2,36.225 55.625,36.8
  region net GND: 55.825,36.925 56.925,36.925 56.925,38.4 57.525,38.95 55.225,38.95 55.825,38.4
  region: 55.825,37.025
  region net NetCN27_A: 57.125,38.3 57.125,36.825 56.4,36.1 56.4,26.475 59.4,26.475 59.9,26.975 59.9,31.85 58.225,33.525 58.225,38.3
  region net GND: 47.85,35.225 44.725,35.225 43.2,36.75 43.2,39.85 47.85,39.85
  region: 45.775,40.325
  region net 12V: 47.85,33.7 47.85,32.025 46.325,30.5 45.1,30.5 45.1,33.6 45.2,33.7
  region net GND: 43.65,36.75 43.2,36.75 43.2,38.525 42.95,38.775 43.825,38.775 43.65,38.6
  region net NetC45_FL_1: 42.55,38.25 42.55,36.35 42.525,36.325 42.525,36.05 42.775,36.05 42.775,36.325 43,36.55 43,38.25
  region net NetC45_FL_2: 41.9,38.25 41.9,36.75 42.075,36.575 42.075,36.05 42.325,36.05 42.325,36.4 42.35,36.425 42.35,38.25
  region net NetC44_FL_1: 41.25,36.975 41.25,36.75 41.325,36.675 41.325,36.05 41.6,36.05 41.6,36.675 41.7,36.775 41.7,36.975
  region net 12V: 41.05,38.25 40.6,38.25 40.6,33.075 42.1,31.575 42.1,30.5 45.1,30.5 45.1,33.6 43.475,33.6 41.8,35.275 41.05,36.025
  region net 12V: 36.5,38.25 36.5,33.775 34.525,31.8 34.525,30.5 31,30.5 31,33.475 35.775,38.25
  region net GND: 38,38.3 37.275,38.85 39.875,38.85 39.1,38.3
  region net GND: 38,36.825 39.1,36.825 39.1,38.85 38,38.85
  region net NetCN25_K: 37.8,38.2 36.7,38.2 36.7,33.675 34.725,31.7 34.725,27.125 35.375,26.475 38.225,26.475 38.225,36.3 37.8,36.725
  region net NetCN25_A: 39.3,38.175 39.3,36.725 38.45,35.875 38.45,26.45 41.375,26.45 41.9,26.975 41.9,31.475 40.4,32.975 40.4,38.175
  region net GND: 36.2,34.875
Bottom Layer:
  rectangle net GND: 35.95,38.375 43.75,42.4
  rectangle net GND: 53.775,38.5 61.575,42.525
  rectangle net GND: 91.85,38.25 99.65,42.25
  rectangle net GND: 110.375,38.45 118.175,42.475
  region net 12V: 72.375,52.45 72.375,31.975 79.1,31.975 79.1,52.45
  region net 12V: 119.65,33.825 119.65,33.325 121.8,33.325 121.8,33.825
  region net 12V: 102.025,35.3 102.025,34.15 101.425,33.55 104.775,33.55 104.175,34.15 104.175,35.3
  region: 76.675,38.825
  region: 76.65,41.65
  region net 12V: 78.45,26.425 75.025,26.425 75.025,30.575 82.6,30.575
  region net 12V: 63.725,35.475 61.775,33.525 67.825,33.525 65.875,35.475
  region: 63.725,35.475
  region net 12V: 47.85,35.525 47.85,33.875 48.275,33.45 48.275,33.275 45.075,33.275 45.7,33.9 45.7,35.525
  region net 12V: 31,33.6 121.8,33.6 121.8,30.5 31,30.5

## Silkscreen, mask and mechanical layers (free items; w line width, h text height)
Top Overlay:
  lines w0.178: 97,100 97,98.675 97.025,98.65 115.075,98.65 115.075,100.05
  lines w0.254: 29.561,72.797 32.361,72.797 32.361,80.597 29.561,80.597 ; 29.821,72.797 27.021,72.797 27.021,72.997 27.021,80.597 29.821,80.597 ; 87.94,93.245 87.94,96.045 88.14,96.045 95.74,96.045 95.74,93.245 ; 87.94,93.505 87.94,90.705 95.74,90.705 95.74,93.505
  text "I2C" at 104.45,97.125 h1.14
  text "CLK" at 87.875,96.425 h0.81
  text "DIO" at 90.775,96.4 h0.81
  text "SWO" at 93.35,96.4 h0.81
  text "S" at 123.65,95.25 h1.27
  text "+" at 123.6,92.65 h1.27
  text "-" at 123.6,90.2 h1.27
  text "nRST" at 90.2,89.525 h0.81
  text "GND" at 93.575,89.5 h0.81
  text "Robot Controller R1 / Isaac Wong / May 2020" at 94.575,82.525 h1.14
  text "Servo" at 25.375,81.15 h1.52
  text "S" at 25.425,78.55 h1.52
  text "+" at 25.425,76 h1.52
  text "-" at 25.45,73.45 h1.52
Bottom Overlay:
  lines w0.178: 77.875,100.05 77.875,98.65 115.075,98.65 115.075,100.05
  text "CAN Bus" at 100.925,96.425 h1.52
Bottom Solder:
  rectangle: 35.95,38.4 43.725,42.375
  rectangle: 53.775,38.525 61.575,42.525
  rectangle: 91.85,38.25 99.65,42.25
  rectangle: 110.375,38.45 118.175,42.475
  region: 79.1,52.45 74.1,52.45 74.1,50.4 72.375,50.4 72.375,33.575 79.1,33.575
  region: 121.8,33.6 31,33.6 31,30.5 121.8,30.5
  region: 109.2,33.6
Mechanical 1:
  the board outline again, w0.1

## Text inside footprints (layer, text, board x,y; h text height)
U5: Top Overlay "1" at 66.965,49.418 h1.52 r90